# Altium PCB DEV-5V-Outside-Pump_2024-03-15.pcbdoc
Units mil, origin at the board's own origin, x right, y up, seen from the top; angles counter-clockwise.
Board outline 4264.35 x 3788.77 mil, 2 copper layers (Top Layer, Bottom Layer); 62 components, 42 nets, 262 pads, 37 vias.
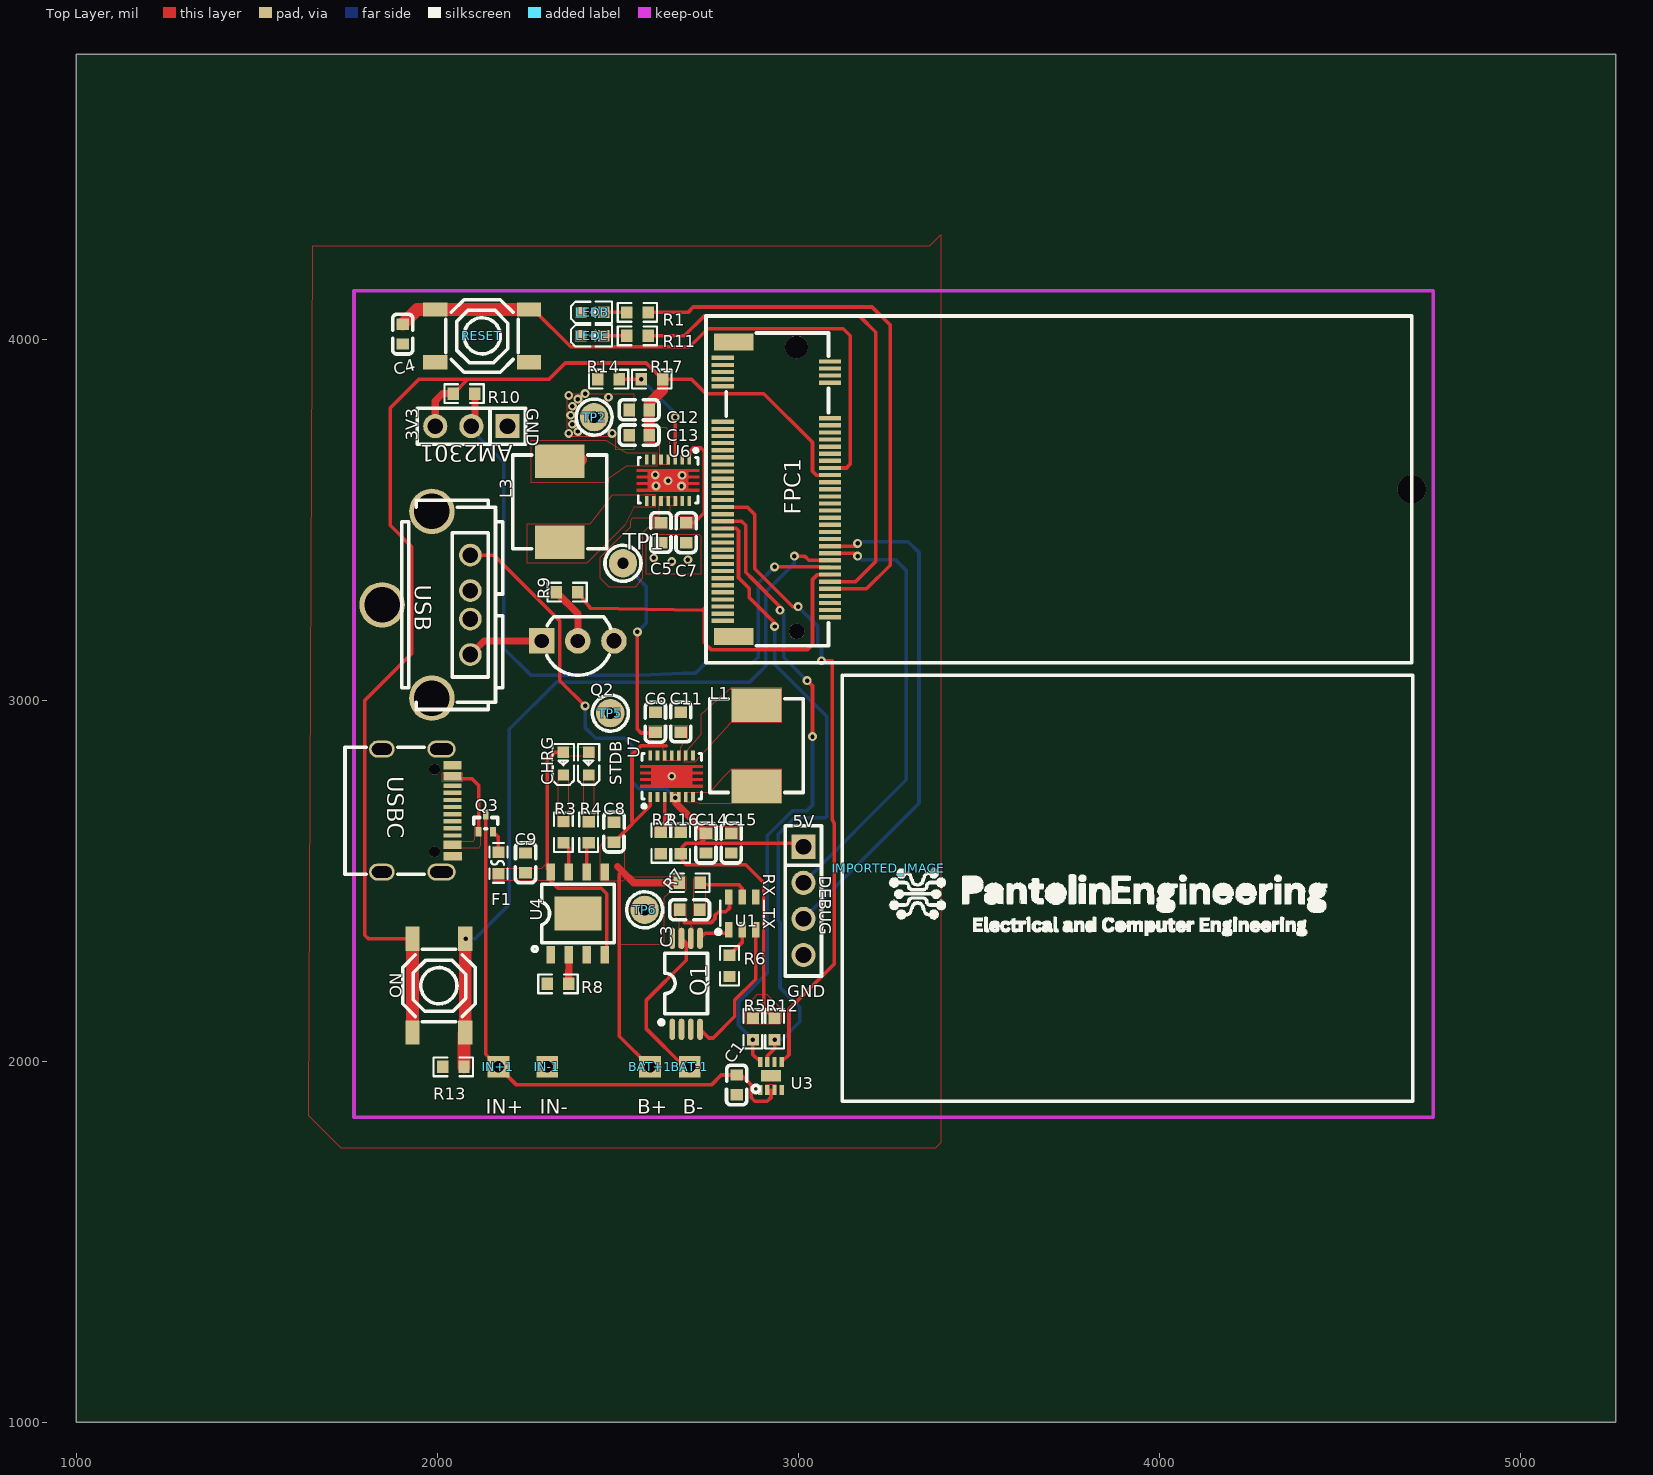
[diagram p0: Top Layer view]
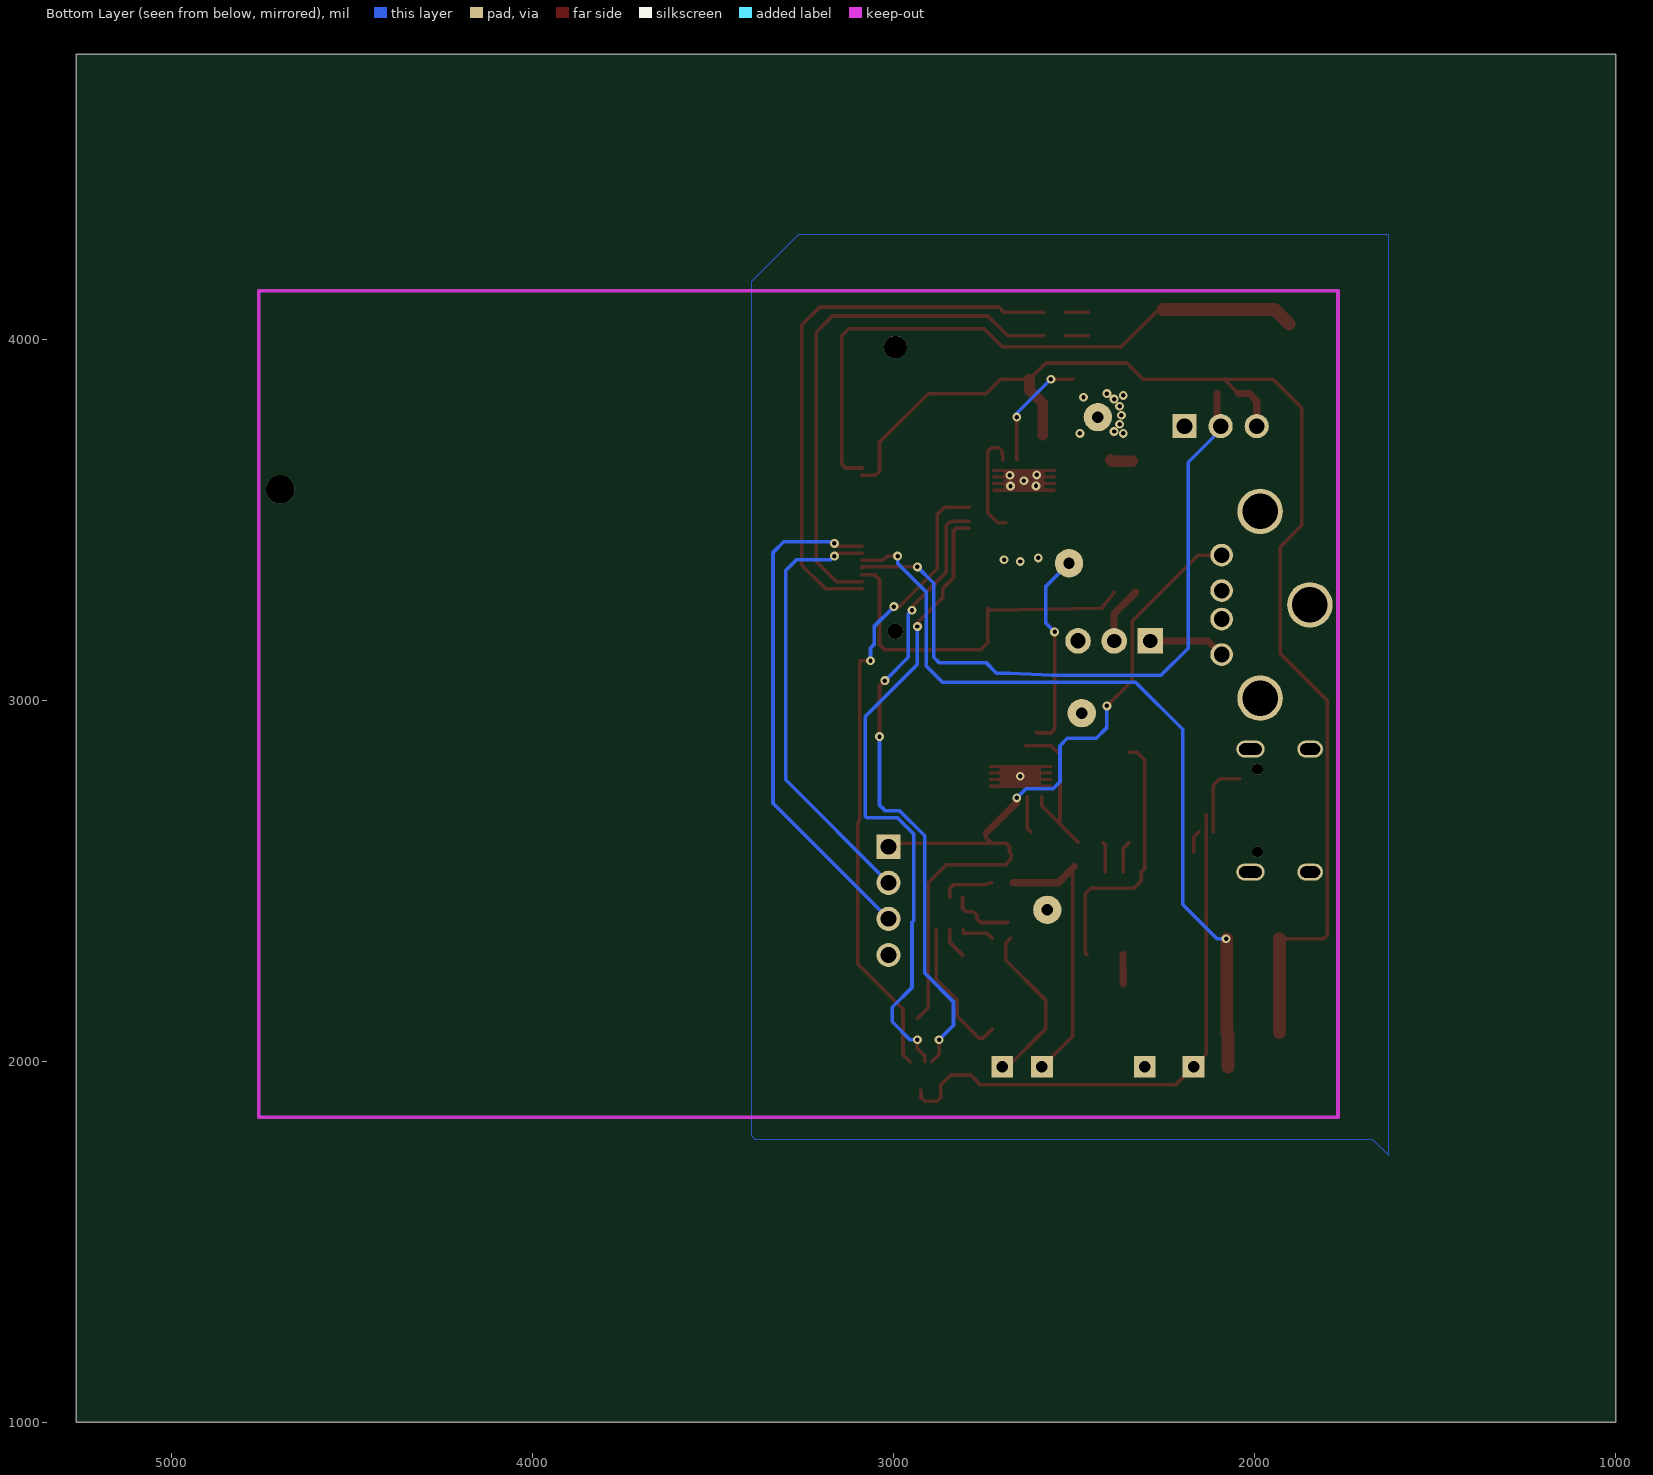
[diagram p1: Bottom Layer view, seen from below]

## Layer stack, top to bottom
Top Layer: signal copper (thickness not stored)
Dielectric: dielectric 12.6, FR-4, Dk 4.8
Bottom Layer: signal copper (thickness not stored)

## Board outline
5264.35,1000 1000,1000 1000,4788.77 5264.35,4788.77

## Components (designator, comment, footprint, x,y, rotation, side; value= is the part's Value field where it differs from the comment)
AM2301 "1125" CONN-TH_1125-1103S0S113CR01 2094.35,3758.77 r180 top
BAT+1 "Pad 04" CON_PAD_SQUARE_32MIL 2589.35,1983.77 r0 top
BAT-1 "Pad 05" CON_PAD_SQUARE_32MIL 2699.35,1983.77 r0 top
C1 "100nF" C0603 2829.35,1933.77 r90 top
C3 "100nF" C0603 2699.35,2418.77 r0 top
C4 "100nF" C0603 1904.35,4013.77 r90 top
C5 "100nF" C0603 2619.35,3463.77 r270 top
C6 "100nF" C0603 2604.35,2938.77 r90 top
C7 "10uF" C0603 2689.35,3463.77 r90 top
C8 "10uF" C0603 2489.35,2633.77 r270 top
C9 "10uF" C0603 2244.35,2548.77 r270 top
C11 "10uF" C0603 2674.35,2938.77 r270 top
C12 "22uF" C0603 2559.35,3803.77 r0 top
C13 "22uF" C0603 2559.35,3733.77 r0 top
C14 "22uF" C0603 2744.35,2603.77 r90 top
C15 "22uF" C0603 2814.35,2603.77 r90 top
CHRG "FC-DA1608BK-470H10" LED0603-RD 2349.35,2823.77 r90 top
DEBUG "2.54-1*4P母" HDR-TH_4P-P2.54-V-F 3014.35,2443.77 r270 top
F1 "1.25A" F0603 2169.35,2548.77 r270 top
FPC1 "AS0BC21-S30BM-7H" CONN-SMD_AS0BC21-S30BM-7H 2939.35,3583.77 r90 top
IMPORTED_IMAGE "IMPORTED_IMAGE" IMPORTED_IMAGE 3250.82,2534.03 r0 top
IN+1 "Pad 01" CON_PAD_SQUARE_32MIL 2169.35,1983.77 r0 top
IN-1 "Pad 02" CON_PAD_SQUARE_32MIL 2304.35,1983.77 r0 top
L1 "1.5uH" IND-SMD_L7.2-W6.6_GPSR0730 2884.35,2873.77 r90 top
L3 "1.5uH" IND-SMD_L7.2-W6.6_GPSR0730 2339.35,3548.77 r270 top
LEDB "FC-DA1608BK-470H10" LED0603-RD 2429.38,4073.74 r0 top
LEDE "XL-1608UGC-04" LED0603-RD_GREEN 2429.36,4008.81 r0 top
ON "TS-1187A-B-A-B" SW-SMD_4P-L5.1-W5.1-P3.70-LS6.5-TL-2 2004.35,2208.77 r90 top
Q1 "FS8205A" TSSOP-8_L4.4-W3.5-P0.65-LS6.4-BL 2689.35,2213.77 r0 top
Q2 "2N2222A" TO-92-3_L4.8-W3.7-P2.54-R 2389.35,3163.77 r180 top
Q3 "NTA4151PT1G" SOT-416_L1.6-W0.8-P1.00-LS1.6-BR 2134.35,2658.77 r270 top
R1 "49.9Ω" R0603 2554.35,4073.77 r0 top
R2 "180k" R0603 2619.35,2603.77 r90 top
R3 "1kΩ" R0603 2349.35,2633.82 r270 top
R4 "1kΩ" R0603 2419.35,2633.77 r270 top
R5 "10kΩ" R0603 2874.35,2088.77 r90 top
R6 "1kΩ" R0603 2809.35,2263.77 r270 top
R7 "100Ω" R0603 2699.35,2493.77 r180 top
R8 "1.6kΩ" R0603 2334.35,2213.77 r0 top
R9 "1kΩ" R0603 2359.35,3298.77 r180 top
R10 "10kΩ" R0603 2074.35,3848.77 r180 top
R11 "49.9Ω" R0603 2554.35,4008.77 r0 top
R12 "10kΩ" R0603 2934.35,2088.77 r90 top
R13 "430Ω" R0603 2044.35,1983.77 r0 top
R14 "180k" R0603 2474.35,3888.77 r0 top
R16 "1.6M" R0603 2674.35,2603.77 r90 top
R17 "1MΩ" R0603 2594.35,3888.77 r180 top
RESET "TS-1187A-B-A-B" SW-SMD_4P-L5.1-W5.1-P3.70-LS6.5-TL-2 2124.35,4008.77 r0 top
STDB "FC-DA1608HRK-620D" LED0603-RD_RED 2419.32,2823.81 r90 top
TP1 "VIN" PKG-TEST-POINT-PTH-1X1 2514.35,3378.77 r0 top
TP2 "GND" PKG-TEST-POINT-PTH-1X1 2434.35,3783.77 r0 top
TP5 "GND" PKG-TEST-POINT-PTH-1X1 2479.35,2963.77 r0 top
TP6 "VIN" PKG-TEST-POINT-PTH-1X1 2574.35,2418.77 r0 top
U1 "DW01A" SOT-23-6_L2.9-W1.6-P0.95-LS2.8-BL 2844.35,2408.77 r0 top
U3 "MAX17048" DFN-8 2924.35,1958.77 r0 top
U4 "TP4056" ESOP-8_L4.9-W3.9-P1.27-LS6.0-BL-EP 2389.35,2408.82 r0 top
U6 "TPS63020DSJR" VSON-14_L4.0-W3.0-P0.50-BL-EP_TI_DSJ 2639.35,3608.77 r180 top
U7 "TPS63020DSJR" VSON-14_L4.0-W3.0-P0.50-BL-EP_TI_DSJ 2649.35,2788.77 r0 top
USB "UBAS-4R-D14D-4D(LF)(SN)" USB-A-TH_UBAS-4R-D14D-4D-LF-SN 1969.35,3263.77 r270 top
USBC "TYPE-C-31-M-12" USB-C_SMD-TYPE-C-31-M-12 1944.34,2693.8 r270 top
? "" ? 3264.35,1675.38 r0 top
? "" ? 1635.67,2988.77 r0 top

## Footprints (in the part's own frame and the unit in brackets; to place one, negate y for a bottom-side part, rotate by r counter-clockwise, add the part's x,y. Pads: shape width x height; smd on the part's side, far side on the other; paste and mask are expansions set on the pad)
C0603 [mm]
  rect 0.8x0.9 smd paste+0 mask+0.051: 1(-0.7,0) 2(0.7,0)
  silkscreen extent -1.41,-0.71 1.39,0.72
CON_PAD_SQUARE_32MIL [mil]
  rect 60x60 hole 32 paste+0 mask+2: P(0,0)
CONN-SMD_AS0BC21-S30BM-7H [mm]
  rect 0.3x1.55 smd paste+0 mask+0.05: 1(9.25,3.775) 2(9,-3.775) 3(8.75,3.775) 4(8.5,-3.775) 5(8.25,3.775) 6(8,-3.775) 7(7.75,3.775) 8(7.5,-3.775) 9(7.25,3.775) 18(5,-3.775) 19(4.75,3.775) 20(4.5,-3.775) 21(4.25,3.775) 22(4,-3.775) 23(3.75,3.775) 24(3.5,-3.775) 25(3.25,3.775) 26(3,-3.775) 27(2.75,3.775) 28(2.5,-3.775) 29(2.25,3.775) 30(2,-3.775) 31(1.75,3.775) 32(1.5,-3.775) 33(1.25,3.775) 34(1,-3.775) 35(0.75,3.775) 36(0.5,-3.775) 37(0.25,3.775) 38(0,-3.775) 39(-0.25,3.775) 40(-0.5,-3.775) 41(-0.75,3.775) 42(-1,-3.775) 43(-1.25,3.775) 44(-1.5,-3.775) 45(-1.75,3.775) 46(-2,-3.775) 47(-2.25,3.775) 48(-2.5,-3.775) 49(-2.75,3.775) 50(-3,-3.775) 51(-3.25,3.775) 52(-3.5,-3.775) 53(-3.75,3.775) 54(-4,-3.775) 55(-4.25,3.775) 56(-4.5,-3.775) 57(-4.75,3.775) 58(-5,-3.775) 59(-5.25,3.775) 60(-5.5,-3.775) 61(-5.75,3.775) 62(-6,-3.775) 63(-6.25,3.775) 64(-6.5,-3.775) 65(-6.75,3.775) 66(-7,-3.775) 67(-7.25,3.775) 68(-7.5,-3.775) 69(-7.75,3.775) 70(-8,-3.775) 71(-8.25,3.775) 72(-8.5,-3.775) 73(-8.75,3.775) 74(-9,-3.775) 75(-9.25,3.775)
  rect 1.2x2.75 smd paste+0 mask+0.05: 76(-10.35,3) 77(10.35,3)
  round 1.1 hole 1.1 unplated paste+0: ""(-10,-1.42)
  round 1.6 hole 1.6 unplated paste+0: ""(10,-1.42)
  silkscreen extent -11,-3.67 11,3.53
CONN-TH_1125-1103S0S113CR01 [mm]
  rect 1.7x1.7 hole 1.1 paste+0 mask+0.05: 1(-2.54,0)
  round 1.7 hole 1.1 paste+0 mask+0.05: 2(0,0) 3(2.54,0)
  silkscreen extent -3.81,-1.27 3.81,1.27
DFN-8 [mil]
  rect 11.8x27.6 smd paste+0 mask+2: P$1(-30,-39) P$2(-10,-39) P$3(10,-39) P$4(30,-39) P$5(30,39) P$6(10,39) P$7(-10,39) P$8(-30,39)
  rect 54.3x31.5 smd paste+0 mask+2: P$9(0,0)
  silkscreen extent -52,-46 -32,-26
ESOP-8_L4.9-W3.9-P1.27-LS6.0-BL-EP [mm]
  rect 0.6x1.2 smd paste+0 mask+0.051: 1(-1.905,-2.908) 2(-0.635,-2.908) 3(0.635,-2.908) 4(1.905,-2.908) 5(1.905,2.908) 6(0.635,2.908) 7(-0.635,2.908) 8(-1.905,2.908)
  rect 3.3x2.4 smd paste+0 mask+0.051: 9(0,0)
  silkscreen extent -3.2,-2.67 2.55,2.05
F0603 [mil]
  rect 31.75x34.02 smd paste-3937.01 mask+2: 1(-29.66,0) 2(29.66,0)
  silkscreen extent -55,-25 55,25
HDR-TH_4P-P2.54-V-F [mm]
  rect 1.7x1.7 hole 1.1 paste+0 mask+0.051: 1(-3.81,0)
  round 1.7 hole 1.1 paste+0 mask+0.051: 2(-1.27,0) 3(1.27,0) 4(3.81,0)
  silkscreen extent -5.29,-1.27 5.29,1.27
IMPORTED_IMAGE [mil]
  silkscreen extent 0,-189 1215,0
IND-SMD_L7.2-W6.6_GPSR0730 [mm]
  rect 2.35x3.5 smd paste+0 mask+0.051: 1(-2.85,0) 2(2.85,0)
  silkscreen extent -3.3,-3.3 3.3,3.3
LED0603-RD [mm]
  rect 0.8x0.8 smd paste+0 mask+0.051: 1(-0.799,-0.003) 2(0.799,0.004)
  silkscreen extent -1.49,-0.75 1.39,0.76
LED0603-RD_GREEN [mm]
  rect 0.8x0.8 smd paste+0 mask+0.051: 1(-0.799,-0.003) 2(0.799,0.004)
  silkscreen extent -1.49,-0.75 1.39,0.76
LED0603-RD_RED [mm]
  rect 0.8x0.8 smd paste+0 mask+0.051: 1(-0.799,-0.003) 2(0.799,0.004)
  silkscreen extent -1.49,-0.75 1.39,0.76
PKG-TEST-POINT-PTH-1X1 [mm]
  round 2 hole 0.8 paste+0 mask+0.102: 1(0,0)
  silkscreen extent -1.27,-1.27 1.27,1.27
R0603 [mil]
  rect 31.75x34.02 smd paste-3937.01 mask+2: 1(-29.65,0) 2(29.66,0)
  silkscreen extent -55,-26 55,26
SOT-23-6_L2.9-W1.6-P0.95-LS2.8-BL [mm]
  rect 0.532x1.072 smd paste+0 mask+0.051: 1(-0.95,-1.149) 2(0,-1.149) 3(0.95,-1.149) 4(0.95,1.149) 5(0,1.149) 6(-0.95,1.149)
  silkscreen extent -1.82,-1.45 1.54,0.89
SOT-416_L1.6-W0.8-P1.00-LS1.6-BR [mm]
  rect 0.7x0.4 smd paste+0 mask+0.051: 1(0.6,-0.508) 2(0.6,0.508) 3(-0.6,0)
  silkscreen extent -0.4,-0.85 0.4,0.85
SW-SMD_4P-L5.1-W5.1-P3.70-LS6.5-TL-2 [mm]
  rect 1.7x1 smd paste+0 mask+0.051: 1(-3.3,1.85) 2(3.3,1.85) 3(-3.3,-1.85) 4(3.3,-1.85)
  silkscreen extent -2.55,-2.55 2.55,2.55
TO-92-3_L4.8-W3.7-P2.54-R [mm]
  rect 1.8x1.8 hole 1 paste+0 mask+0.051: 1(2.54,0)
  round 1.8 hole 1 paste+0 mask+0.051: 2(0,0)
  round 1.8 hole 1.082 paste+0 mask+0.051: 3(-2.54,0)
  silkscreen extent -2.3,-1.7 2.2,2.41
TSSOP-8_L4.4-W3.5-P0.65-LS6.4-BL [mm]
  oval 0.4x1.5 smd paste+0 mask+0.051: 1(-0.975,-3.2) 2(-0.325,-3.2) 3(0.325,-3.2) 4(0.975,-3.2) 5(0.975,3.2) 6(0.325,3.2) 7(-0.325,3.2) 8(-0.975,3.2)
  silkscreen extent -1.89,-2.87 1.5,2.16
USB-A-TH_UBAS-4R-D14D-4D-LF-SN [mm]
  round 1.6 hole 1.1 paste+0 mask+0.051: 1(-3.5,3.105) 2(-1,3.105) 3(1,3.105) 4(3.5,3.105)
  round 3.2 hole 2.5 paste+0 mask+0.051: 5(-6.57,0.395) 6(6.57,0.395) 7(0,-3.105)
  silkscreen extent -7.37,-1.73 7.37,5.38
USB-C_SMD-TYPE-C-31-M-12 [mm]
  oval 1.2x2 hole 0.8 slot 1.6 at 90 deg paste+0 mask+0.051: 0(-4.325,1.716) 1(4.325,1.716)
  oval 1.2x1.8 hole 0.8 slot 1.4 at 90 deg paste+0 mask+0.051: 2(4.325,-2.484) 3(-4.325,-2.484)
  rect 0.3x1.3 smd paste-100 mask+0.051: A1(-3.35,2.484) A4(-2.55,2.484) A5(-1.25,2.484) A6(-0.25,2.484) A7(0.25,2.484) A8(1.25,2.484) A9(2.55,2.484) A12(3.35,2.484) B1(3.05,2.484) B4(2.25,2.484) B5(1.75,2.484) B6(0.75,2.484) B7(-0.75,2.484) B8(-1.75,2.484) B9(-2.25,2.484) B12(-3.05,2.484)
  round 0.75 hole 0.75 unplated paste+0: ""(-2.9,1.216) ""(2.9,1.216)
  silkscreen extent -4.47,-5.08 4.47,0.5
VSON-14_L4.0-W3.0-P0.50-BL-EP_TI_DSJ [mm]
  rect 0.25x0.7 smd paste+0 mask+0.051: 1(-1.5,-1.45) 2(-1,-1.45) 3(-0.5,-1.45) 4(0,-1.45) 5(0.5,-1.45) 6(1,-1.45) 7(1.5,-1.45) 8(1.5,1.45) 9(1,1.45) 10(0.5,1.45) 11(0,1.45) 12(-0.5,1.45) 13(-1,1.45) 14(-1.5,1.45)
  Top Layer region: -2.2,0.79 -2.2,0.59 -1.43,0.59 -1.43,0.33 -2.2,0.33 -2.2,0.13 -1.43,0.13 -1.43,-0.13 -2.2,-0.13 -2.2,-0.33 -1.43,-0.33 -1.43,-0.59 -2.2,-0.59 -2.2,-0.79 2.2,-0.79 2.2,-0.59 1.43,-0.59 1.43,-0.33 2.2,-0.33 2.2,-0.13 1.43,-0.13 1.43,0.13 2.2,0.13 2.2,0.33 1.43,0.33 1.43,0.59 2.2,0.59 2.2,0.79
  silkscreen extent -2.1,-2.23 2.1,1.6
? [mil]

## Free pads (board coordinates)
  round 78.74 hole 78.74 unplated paste+0: ""(4699.35,3583.77)

## Via types
v1: diameter 24.41, hole 12.2, Top Layer to Bottom Layer, tented both sides, 37 vias

## Nets (pads, with @x,y where several pads share a name; then routed paths per layer and width w, separated by ;. In a path a pad name is that pad's centre, name@x,y a point inside that pad or via, vN(x,y) a via of type N, cw(c..) or ccw(c..) an arc to the next point about the centre after c; other vN are vias at no path point)
+3V3: AM2301.3 C12.2 C13.2 FPC1.34 ON.1 ON.2 R10.2 R17.1 U6.4 U6.5 | length 3736.3
  Top Layer w10: ON.2@1931.55,2338.67 1809.45,2338.67 1799.35,2348.77 1799.35,2998.77 1929.35,3128.77 1929.35,3423.77 1869.35,3483.77 1869.35,3808.77 1949.35,3888.77 2084.65,3888.77 ; R10.2@2044.65,3848.77 2084.65,3888.77 ; R17.1 2704.35,3888.77 2744.35,3848.77 2904.35,3848.77 3039.35,3713.77 3039.35,3633.77 3049.98,3623.14 FPC1.34 ; R17.1 2579.05,3933.77 2354.35,3933.77 2309.35,3888.77 2084.65,3888.77
  Top Layer w19.68: AM2301.3 1994.35,3828.77 2014.35,3848.77 R10.2
  Top Layer w29.53: C13.2 C12.2 ; C12.2@2587.35,3803.77 2587.35,3821.97 2623.95,3858.27 R17.1
  Top Layer w35.43: ON.1 ON.2
+5V: C14.2 C15.2 DEBUG.1 R5.2 R12.2 R16.1 U7.4 U7.5 USB.1 | length 2227.1
  Top Layer w10: USB.1 2156.56,3401.56 2339.35,3218.77 2339.35,3053.77 v1(2409.35,2983.77) ; C14.2@2744.35,2631.37 2744.35,2618.77 2729.35,2603.77 ; R12.2@2934.35,2118.47 2904.35,2148.47 2904.35,2493.77 2854.35,2543.77 2689.35,2543.77 2674.35,2563.77 R16.1 2679.35,2579.07 2679.35,2593.77 2689.35,2603.77 2708.15,2603.77 2729.35,2603.77 ; DEBUG.1 3004.35,2603.77 2729.35,2603.77
  Top Layer w19.68: v1(2659.35,2728.77) 2659.35,2716.33 C14.2
  Bottom Layer w10: v1(2409.35,2983.77) 2409.35,2923.77 2439.35,2893.77 2519.35,2893.77 2539.35,2873.77 2539.35,2773.77 2559.35,2753.77 2634.35,2753.77 v1(2659.35,2728.77)
AM: AM2301.2 FPC1.60 R10.1 | length 1924
  Top Layer w10: v1(2934.35,3368.77) 3086.44,3368.77 FPC1.60
  Top Layer w19.68: AM2301.2 2104.01,3768.43 R10.1
  Bottom Layer w10: AM2301.2 2094.35,3748.77 2184.35,3658.77 2184.35,3143.77 2259.35,3068.77 2559.35,3068.77 2679.35,3073.77 2714.35,3073.77 2744.35,3103.77 2874.35,3103.77 2889.35,3118.77 2889.35,3323.77 v1(2934.35,3368.77)
BATT_ALERT: FPC1.43 U3.P$5 | length 1789.5
  Top Layer w10: FPC1.43@2790.75,3534.57 2859.35,3533.77 2879.35,3513.77 2879.35,3363.77 2984.35,3258.77 v1(2999.35,3258.77) ; U3.P$5 2974.35,2017.77 2974.35,2143.77 3099.35,2268.77 3099.35,2658.77 3094.35,2668.77 3094.35,3108.77 v1(3064.35,3108.77)
  Bottom Layer w10: v1(2999.35,3258.77) 3054.35,3203.77 3054.35,3153.77 3064.35,3143.77 v1(3064.35,3108.77)
C3_1: BAT-1.P C3.1 Q1.6 Q1.7 U1.6 | length 644
  Top Layer w10: Q1.7 2689.35,2326.97 2689.35,2278.77 2579.35,2168.77 2579.35,2088.77 2684.35,1983.77 BAT-1.P ; 2684.35,2383.77 2739.35,2383.77 2759.35,2383.77 2769.35,2393.77 2769.35,2403.77 2779.35,2413.77 2799.35,2413.77 2809.35,2423.77 2809.35,2451.61 U1.6@2806.95,2454.01
C3_2: C3.2 R7.1 U1.5 | length 144.8
  Top Layer w10: R7.1 2749.35,2488.77 2834.35,2488.77 2844.35,2478.77 U1.5
C9_2: C9.2 CHRG.2 F1.2 STDB.2 U4.4 U4.8 | length 733.9
  Top Layer w10: U4.8 2314.35,2498.77 2334.35,2478.77 2454.35,2478.77 2469.35,2463.77 2469.35,2299.32 U4.4 ; U4.8@2314.35,2523.37 2304.35,2533.37 2304.35,2833.77 2325.85,2855.27 CHRG.2@2349.25,2855.27
EN: C4.2 FPC1.32 RESET.1 RESET.2 | length 1744.2
  Top Layer w10: RESET.2@2254.25,4081.57 2266.55,4081.57 2369.35,3978.77 2699.35,3978.77 2749.35,4028.77 3124.35,4028.77 3144.35,4008.77 3144.35,3653.77 3133.45,3642.87 FPC1.32@3087.95,3642.87
  Top Layer w35.43: C4.2 1944.63,4081.61 RESET.1 RESET.2
F1_1: F1.1 Q3.2 | length 62.9
  Top Layer w10: Q3.2@2154.35,2635.15 2169.35,2620.15 F1.1
GND: AM2301.1 C1.1 C4.1 C5.2 C6.2 C7.1 C8.1 C9.1 C11.1 C12.1 C13.1 C14.1 C15.1 DEBUG.4 FPC1.23 IN-1.P LEDB.1 LEDE.1 Q1.2 Q1.3 Q2.3 R2.1 R6.2 R8.1 R13.1 R14.1 RESET.3 RESET.4 TP2.1 TP5.1 U3.P$1 U3.P$4 U3.P$6 U3.P$9 U4.1 U4.3 U6.2 U6.13 U7.2 U7.13 USBC.0 USBC.1 USBC.2 USBC.3 USBC.A1 USBC.A12 USBC.B1 USBC.B12
  other v1: 2649.35,2788.77 2649.35,3383.77 2694.35,3388.77 2599.35,3393.77 2605.93,3593.22 2676.45,3592.7 2639.35,3607.7 2678.03,3622.7 2603.56,3623.75 2364.35,3738.77 2484.35,3738.77 2389.35,3743.77 2374.35,3763.77 2369.35,3788.77 2374.35,3813.77 2389.35,3833.77 2474.35,3838.77 2364.35,3843.77 2409.35,3848.77
GPIO38: FPC1.66 R1.2 | length 1555.8
  Top Layer w10: R1.2 2694.35,4073.77 2709.35,4088.77 3204.35,4088.77 3254.35,4038.77 3254.35,3373.77 3188.75,3308.17 FPC1.66
GPIO39: FPC1.64 R11.2 | length 1456.3
  Top Layer w10: R11.2 2684.35,4008.77 2739.35,4063.77 3169.35,4063.77 3214.35,4018.77 3214.35,3383.77 3158.45,3327.87 FPC1.64
LEDB_2: LEDB.2 R1.1 | length 63.8
  Top Layer w10: LEDB.2@2460.85,4073.88 R1.1
LEDE_2: LEDE.2 R11.1 | length 63.9
  Top Layer w10: LEDE.2 R11.1
OC: Q1.4 U1.3 | length 394.9
  Top Layer w10: Q1.4 2751.76,2063.77 2764.35,2063.77 2824.35,2123.77 2824.35,2168.77 2881.75,2226.17 U1.3
OD: Q1.5 U1.1 | length 94.8
  Top Layer w10: Q1.5 2741.75,2353.77 2806.95,2353.77 U1.1@2806.95,2363.57
P+: C1.2 IN+1.P Q3.3 U3.P$2 U3.P$3 | length 1575
  Top Layer w10: Q3.3 2134.35,2018.77 IN+1.P 2219.35,1933.77 2759.35,1933.77 2786.91,1961.33 C1.2 2841.75,1961.37 2869.35,1933.77 2869.35,1898.77 2879.35,1888.77 2914.35,1888.77 2924.35,1898.77 2924.35,1918.77
PUMP: FPC1.58 ON.3 ON.4 R13.2 | length 2227
  Top Layer w10: ON.4 2077.27,2338.77 v1(2079.35,2338.77) ; v1(2989.35,3398.77) 3017.05,3398.77 3028.85,3386.87 FPC1.58
  Top Layer w35.43: R13.2 2074.01,2075.67 2077.19,2078.85 ON.4
  Bottom Layer w10: v1(2079.35,2338.77) 2104.35,2338.77 2199.35,2433.77 2199.35,2918.77 2329.35,3048.77 2864.35,3048.77 2909.35,3093.77 2909.35,3298.77 2989.35,3378.77 v1(2989.35,3398.77)
Q2_2: Q2.2 R9.2 | length 159.7
  Top Layer w19.68: R9.2@2329.65,3298.77 2389.35,3239.07 Q2.2
R3_1: CHRG.1 R3.1
R3_2: R3.2 U4.7 | length 87.1
  Top Layer w10: R3.2 2364.35,2589.16 U4.7
R6_1: R6.1 U1.2 | length 84.6
  Top Layer w10: R6.1 2844.35,2328.43 U1.2
R8_2: R8.2 U4.2 | length 80.5
  Top Layer w19.68: R8.2 U4.2
S$22309: 
S$22319: 
S$22602: 
SCL: FPC1.49 R12.1 U3.P$7 | length 1802
  Top Layer w10: FPC1.49 2827.61,3475.51 2834.35,3468.77 2834.35,3338.77 2849.35,3323.77 ; 2846.95,3326.17 2864.35,3308.77 2864.35,3283.77 2934.35,3213.77 v1(2934.35,3203.77) ; U3.P$7 2914.35,2013.77 2934.35,2033.77 v1(2934.35,2059.11)
  Bottom Layer w10: v1(2934.35,2059.11) 2954.69,2059.11 3004.35,2108.77 3004.35,2148.77 2949.35,2203.77 2949.35,2383.77 2944.35,2388.77 2944.35,2628.77 2989.35,2673.77 3074.35,2673.77 3079.35,2678.77 3079.35,2953.77 2934.35,3098.77 v1(2934.35,3203.77)
SDA: FPC1.47 R5.1 U3.P$8 | length 1764.2
  Top Layer w10: FPC1.47 2842.93,3495.19 2854.35,3483.77 2854.35,3353.77 2874.35,3333.77 2949.35,3258.77 v1(2949.35,3248.77) ; v1(2874.35,2059.11) 2874.35,2017.77 U3.P$8 ; v1(3024.35,3053.77) 3039.35,3038.77 v1(3039.35,2898.77)
  Bottom Layer w10: v1(2874.35,2059.11) 2834.35,2099.07 2834.35,2163.77 2914.35,2243.77 2914.35,2623.77 2984.35,2693.77 3024.35,2693.77 3032.65,2702.07 3039.35,2708.77 v1(3039.35,2898.77) ; v1(2949.35,3248.77) 2959.35,3238.77 2959.35,3118.77 v1(3024.35,3053.77)
STDB_1: R4.1 STDB.1
U0RXD: DEBUG.2 FPC1.56 | length 1214.2
  Top Layer w10: FPC1.56 3156.51,3406.61 v1(3164.35,3398.77)
  Bottom Layer w10: DEBUG.2 3299.35,2778.77 3299.35,3313.77 3299.35,3358.77 3269.35,3388.77 3174.35,3388.77 v1(3164.35,3398.77)
U0TXD: DEBUG.3 FPC1.54 | length 1411.5
  Top Layer w10: FPC1.54 3156.87,3426.29 v1(3164.35,3433.77)
  Bottom Layer w10: DEBUG.3 3334.35,2713.77 3334.35,3323.77 3334.35,3408.77 3304.35,3438.77 3169.35,3438.77 v1(3164.35,3433.77)
U4_6: R4.2 U4.6 | length 82.9
  Top Layer w10: U4.6 2414.35,2599.11 R4.2
U6_3: R14.2 R17.2 U6.3 | length 322.8
  Top Layer w10: R14.2 v1(2564.69,3888.77) ; U6.3 v1(2659.35,3783.77)
  Bottom Layer w10: v1(2564.69,3888.77) 2659.35,3794.11 v1(2659.35,3783.77)
U6_6: L3.1 U6.6 U6.7 | length 62
  Top Layer w31.5: L3.1 2394.46,3660.98 L3.1@2399.35,3665.87
U6_8: L3.2 U6.8 U6.9
U7_3: R2.2 R16.2 U7.3 | length 102.5
  Top Layer w10: R2.2 2629.67,2643.75 U7.3
U7_6: L1.1 U7.6 U7.7
U7_8: L1.2 U7.8 U7.9
USB_4: Q2.1 USB.4 | length 213.4
  Top Layer w19.68: USB.4 2129.39,3163.77 Q2.1
USB_5V: Q3.1 USBC.A4 USBC.A9 USBC.B4 USBC.B9 | length 208.5
  Top Layer w10: USBC.B9 2095.74,2782.38 2114.35,2763.77 Q3.1@2114.35,2635.15
VBAT: BAT+1.P C5.1 C6.1 C7.2 C8.2 C11.2 R7.2 TP1.1 TP6.1 U4.5 U6.1 U6.10 U6.11 U6.12 U7.1 U7.10 U7.11 U7.12 | length 2079.1
  Top Layer w10: C8.2 2590.29,2707.15 U7.1 ; 2504.35,2518.77 2504.35,2483.77 2504.35,2068.77 BAT+1.P ; 2539.52,2656.38 2539.35,2666.56 2539.35,2848.77 2564.35,2873.77 2634.35,2873.77 ; v1(2554.35,3188.77) 2554.35,2918.77 2564.35,2908.77 2601.95,2908.77 C6.1 ; C7.2@2689.35,3491.37 2711.95,3491.37 2739.35,3518.77 2739.35,3688.77 2729.35,3698.77 2709.35,3698.77 2699.35,3688.77 U6.1
  Top Layer w19.68: 2499.35,2538.77 2514.35,2523.77 2544.35,2493.77 R7.2@2669.65,2493.77
  Bottom Layer w10: TP1.1 2579.35,3313.77 2579.35,3213.77 v1(2554.35,3188.77)
WTR: FPC1.62 R9.1 | length 1018.1
  Top Layer w10: R9.1 2424.35,3253.77 2734.35,3248.77 2739.35,3253.77 2739.35,3158.77 2759.35,3138.77 3024.35,3138.77 3039.35,3153.77 3039.35,3333.77 3053.15,3347.57 FPC1.62
pads on no net: FPC1. FPC1.1 FPC1.2 FPC1.3 FPC1.4 FPC1.5 FPC1.6 FPC1.7 FPC1.8 FPC1.9 FPC1.18 FPC1.19 FPC1.20 FPC1.21 FPC1.22 FPC1.24 FPC1.25 FPC1.26 FPC1.27 FPC1.28 FPC1.29 FPC1.30 FPC1.31 FPC1.33 FPC1.35 FPC1.36 FPC1.37 FPC1.38 FPC1.39 FPC1.40 FPC1.41 FPC1.42 FPC1.44 FPC1.45 FPC1.46 FPC1.48 FPC1.50 FPC1.51 FPC1.52 FPC1.53 FPC1.55 FPC1.57 FPC1.59 FPC1.61 FPC1.63 FPC1.65 FPC1.67 FPC1.68 FPC1.69 FPC1.70 FPC1.71 FPC1.72 FPC1.73 FPC1.74 FPC1.75 FPC1.76 FPC1.77 Q1.1 Q1.8 U1.4 U4.9 U6.14 U7.14 USB.2 USB.3 USB.5 USB.6 USB.7 USBC. USBC.A5 USBC.A6 USBC.A7 USBC.A8 USBC.B5 USBC.B6 USBC.B7 USBC.B8

## Polygon pours and split planes (outlines as drawn)
GND on Bottom Layer (solid): 1629.35,4288.77 3264.35,4288.77 3394.35,4158.77 3394.35,1793.77 3384.35,1783.77 1674.35,1783.77 1629.35,1738.77
U6_6 on Top Layer (solid): 2259.35,3718.77 2259.35,3603.77 2474.35,3603.77 2474.35,3613.77 2524.35,3648.77 2529.35,3648.77 2609.35,3648.77 2609.35,3683.77 2559.35,3683.77 2524.35,3683.77 2474.35,3713.77 2469.35,3718.77 2449.35,3718.77 2419.35,3718.77 2414.35,3718.77 2389.35,3718.77 2359.35,3718.77 2349.35,3718.77 2344.35,3718.77
U6_8 on Top Layer (solid): 2574.35,3568.77 2604.35,3568.77 2604.35,3533.77 2544.35,3533.77 2519.35,3483.77 2414.35,3378.77 2249.35,3378.77 2249.35,3488.77 2424.35,3488.77 2459.35,3533.77 2484.35,3568.77 2489.35,3568.77 2604.35,3568.77
VBAT on Top Layer (solid): 2614.35,3563.77 2644.35,3563.77 2664.35,3563.77 2664.35,3538.77 2644.35,3538.77 2644.35,3508.77 2709.35,3508.77 2709.35,3473.77 2599.35,3473.77 2599.35,3508.77 2614.35,3508.77 2614.35,3563.77
+3V3 on Top Layer (solid): 2614.35,3653.77 2644.35,3653.77 2644.35,3688.77 2644.35,3708.77 2644.35,3743.77 2634.35,3753.77 2574.35,3753.77 2574.35,3713.77 2614.35,3713.77 2614.35,3653.77
GND on Top Layer (solid): 2494.35,3693.77 2494.35,3728.77 2364.35,3728.77 2359.35,3728.77 2359.35,3733.77 2359.35,3848.77 2544.35,3848.77 2544.35,3693.77 2494.35,3693.77
GND on Top Layer (solid): 2579.35,3458.77 2724.35,3458.77 2729.35,3453.77 2729.35,3348.77 2579.35,3348.77
VBAT on Top Layer (solid): 2624.35,2833.77 2674.35,2833.77 2674.35,2868.77 2684.35,2883.77 2694.35,2893.77 2694.35,2928.77 2584.35,2928.77 2584.35,2893.77 2614.35,2878.77 2624.35,2868.77 2624.35,2833.77
USB_5V on Top Layer (solid): 2019.35,2608.77 2069.35,2608.77 2099.35,2608.77 2104.35,2613.77 2104.35,2648.77 2119.35,2648.77 2119.35,2618.77 2119.35,2598.77 2114.35,2588.77 2019.35,2588.77 2019.35,2608.77
USB_5V on Top Layer (solid): 2014.35,2798.77 2069.35,2798.77 2069.35,2773.77 2014.35,2773.77
VBAT on Top Layer (solid): 2459.35,2498.77 2514.35,2498.77 2519.35,2503.77 2519.35,2508.77 2519.35,2618.77 2509.35,2618.77 2469.35,2618.77 2459.35,2608.77 2449.35,2593.77 2449.35,2508.77 2449.35,2503.77 2454.35,2498.77 2459.35,2498.77
+5V on Top Layer (solid): 2854.35,2133.77 2854.35,2103.77 2949.35,2103.77 2954.35,2108.77 2954.35,2133.77 2854.35,2133.77
+5V on Top Layer (solid): 2854.35,2133.77 2954.35,2133.77 2954.35,2143.77 2914.35,2183.77 2884.35,2183.77 2854.35,2148.77 2854.35,2143.77
U7_8 on Top Layer (solid): 2684.35,2858.77 2684.35,2828.77 2714.35,2828.77 2814.35,2938.77 2819.35,2938.77 2954.35,2938.77 2954.35,3033.77 2814.35,3033.77 2814.35,3028.77 2814.35,3033.77 2774.35,2998.77 2729.35,2958.77 2729.35,2903.77 2689.35,2858.77 2684.35,2858.77 2684.35,2828.77
U7_6 on Top Layer (solid): 2684.35,2743.77 2684.35,2718.77 2714.35,2718.77 2724.35,2713.77 2814.35,2713.77 2819.35,2713.77 2824.35,2713.77 2884.35,2713.77 2954.35,2713.77 2954.35,2808.77 2814.35,2808.77 2789.35,2783.77 2754.35,2743.77 2714.35,2743.77 2684.35,2743.77
C3_2 on Top Layer (solid): 2714.35,2508.77 2709.35,2503.77 2709.35,2403.77 2744.35,2403.77 2744.35,2508.77
C3_1 on Top Layer (solid): 2669.35,2368.77 2669.35,2313.77 2674.35,2313.77 2709.35,2313.77 2709.35,2368.77 2689.35,2388.77 2689.35,2398.77 2689.35,2433.77 2654.35,2433.77 2654.35,2403.77 2669.35,2388.77 2669.35,2373.77 2669.35,2313.77
P+ on Top Layer (solid): 2909.35,1933.77 2909.35,1908.77 2939.35,1908.77 2939.35,1933.77 2909.35,1933.77
VBAT on Top Layer (solid): 2499.35,2323.77 2624.35,2323.77 2629.35,2328.77 2629.35,2453.77 2639.35,2463.77 2644.35,2468.77 2684.35,2468.77 2689.35,2473.77 2689.35,2508.77 2684.35,2513.77 2679.35,2513.77 2654.35,2513.77 2649.35,2508.77 2499.35,2508.77
+5V on Top Layer (solid): 2644.35,2743.77 2644.35,2718.77 2674.35,2718.77 2674.35,2743.77
U7_3 on Top Layer (solid): 2604.35,2648.77 2689.35,2648.77 2689.35,2618.77 2604.35,2618.77
R3_1 on Top Layer (solid): 2334.35,2803.77 2334.35,2648.77 2364.35,2648.77 2364.35,2803.77
STDB_1 on Top Layer (solid): 2404.35,2803.77 2404.35,2648.77 2434.35,2648.77 2434.35,2803.77
C9_2 on Top Layer (solid): 2154.35,2533.77 2259.35,2533.77 2289.35,2533.77 2299.35,2543.77 2324.35,2543.77 2324.35,2498.77 2154.35,2498.77
C9_2 on Top Layer (solid): 2339.35,2868.77 2434.35,2868.77 2434.35,2838.77 2429.35,2843.77 2334.35,2843.77
+5V on Top Layer (solid): 2724.35,2648.77 2724.35,2613.77 2834.35,2613.77 2834.35,2648.77 2724.35,2648.77
VBAT on Top Layer (solid): 2634.35,3503.77 2539.35,3503.77 2534.35,3493.77 2534.35,3478.77 2489.35,3433.77 2449.35,3393.77 2449.35,3338.77 2474.35,3313.77 2549.35,3313.77 2569.35,3338.77 2569.35,3463.77 2574.35,3468.77 2584.35,3478.77 2634.35,3478.77
GND on Top Layer (solid): 1654.35,4258.77 3364.35,4258.77 3394.35,4288.77 3394.35,1773.77 3379.35,1758.77 1734.35,1758.77 1644.35,1848.77

## Silkscreen, mask and mechanical layers (free items; w line width, h text height)
Top Overlay:
  lines w10 net S$22309: 2744.35,4063.77 2744.35,3103.77 4699.35,3103.77 4699.35,4063.77 2749.35,4063.77
  lines w10 net S$22319: 3121.85,3068.77 3121.85,1888.77 4701.85,1888.77 4701.85,3068.77 3126.85,3068.77
  text "GND" at 2247.76,3808.77 h33.19 r270
  text "3V3" at 1945.94,3718.77 h33.19 r90
  text "5V" at 2984.35,2647.18 h33.19
  text "RX" at 2902.76,2518.77 h33.19 r270
  text "TX" at 2902.76,2423.77 h33.19 r270
  text "GND" at 2969.35,2177.18 h33.19
  text "IN+" at 2134.35,1853.45 h40.63
  text "IN-" at 2284.35,1853.45 h40.63
  text "B+" at 2554.35,1853.45 h40.63
  text "B-" at 2679.35,1853.45 h40.63